# Altium PCB MotionGlove.PcbDoc (part 2 of 2)
Units mm, origin at the board's own origin, x right, y up, seen from the top; angles counter-clockwise.
Board outline 57.6 x 36.45 mm, 2 copper layers (Top Layer, Bottom Layer); 120 components, 83 nets, 444 pads, 151 vias.
Unrouted connection lines stored in the file: 1.
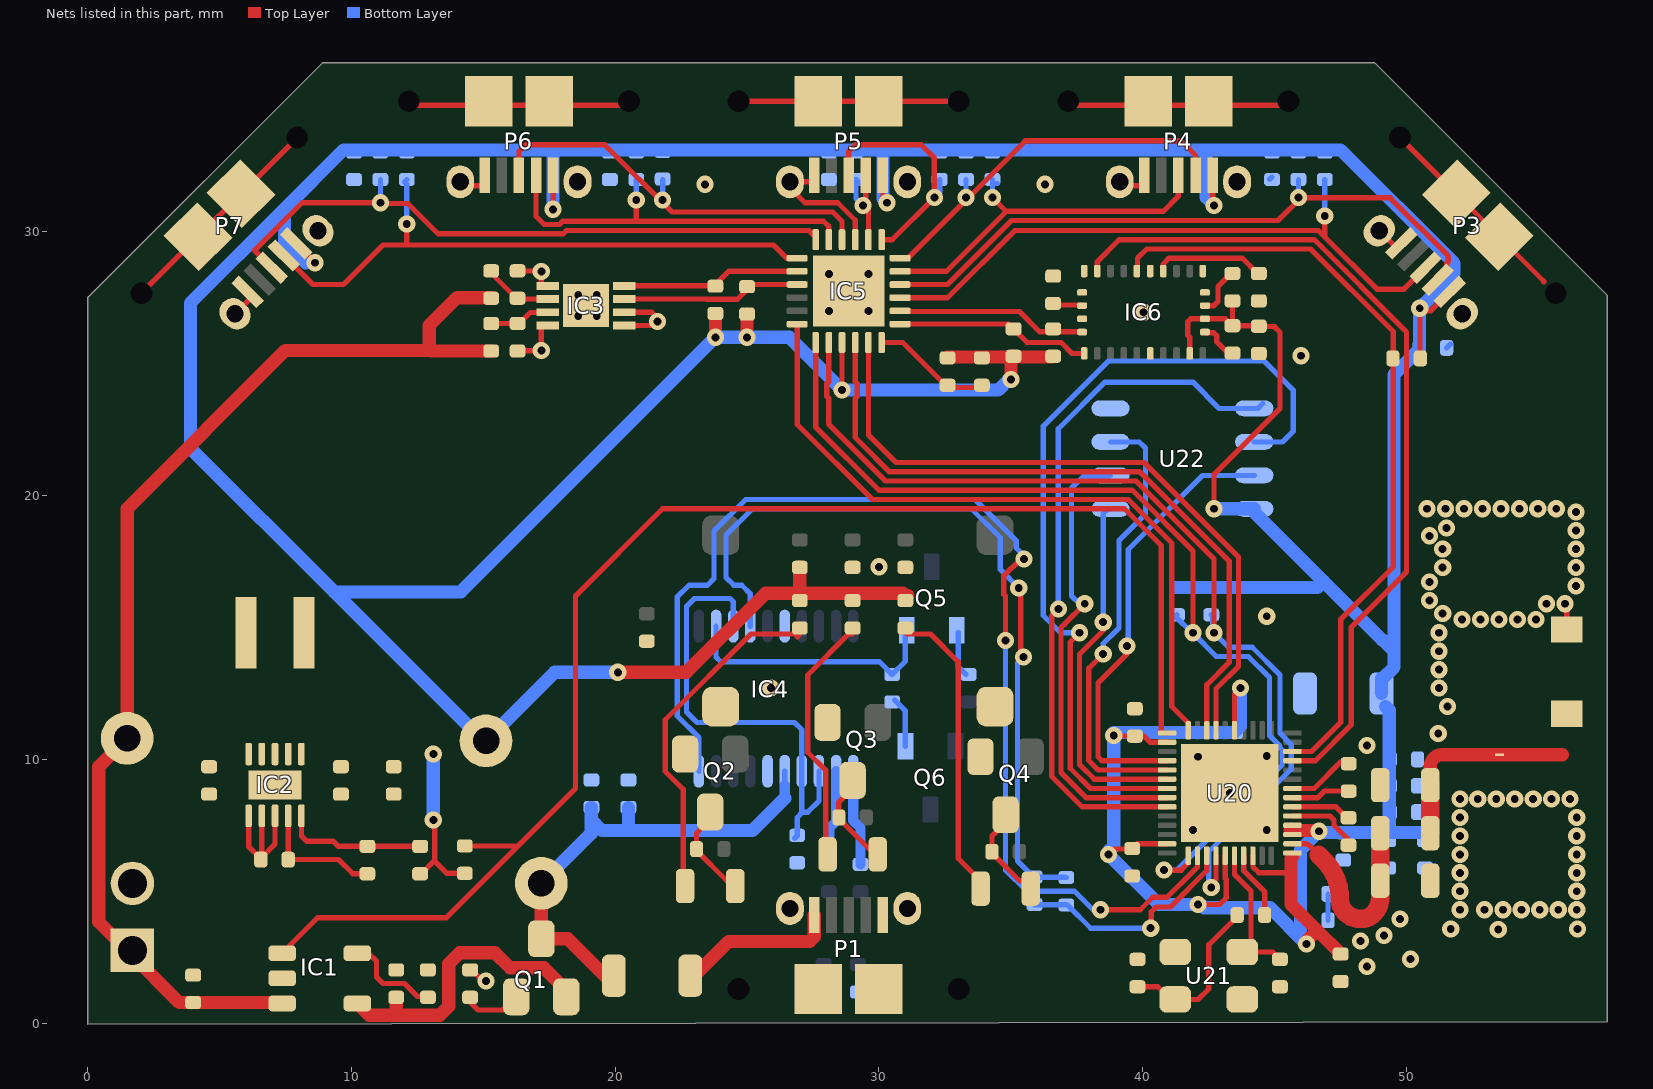
[diagram p2: the nets of this part, all layers, seen from the top]

## Via types
v1: diameter 0.65, hole 0.3, Top Layer to Bottom Layer, 151 vias

## Nets (pads, with @x,y where several pads share a name; then routed paths per layer and width w, separated by ;. In a path a pad name is that pad's centre, name@x,y a point inside that pad or via, vN(x,y) a via of type N, cw(c..) or ccw(c..) an arc to the next point about the centre after c; other vN are vias at no path point) (continued)
GND: C1.1 C3.1 C4.1 C5.2 C6.1 C7.1 C8.1 C9.1 C10.2 C11.1 C12.1 C13.2 C14.2 C17.1 C18.1 C19.1 C21.1 C22.1 C23.1 C24.1 C25.1 C26.2 C27.2 C28.2 C29.2 C30.2 C31.1 C32.1 C33.1 C34.1 C35.1 C36.1 C37.1 C38.1 C39.1 C40.1 C41.1 C42.1 C43.1 C44.1 C45.1 E1.1 E1.2 IC1.2 IC2.3 IC2.9 IC2.11 IC3.1 IC3.4 IC3.5 IC3.6 IC3.9 IC4.6 IC4.16 IC5.9 IC5.25 IC6.2 IC6.5 IC6.6 IC6.10 IC6.15 IC6.16 IC6.18 IC6.25 NT1.2 P1.5 P1.Shell P2.2 P3.5 P3.Shell P4.5 P4.Shell P5.5 P5.Shell P6.5 P6.Shell P7.5 P7.Shell P21.2 P22.2 Q2.S Q3.S Q4.S R1.1 R2.1 R4.1 R19.2 U20.49 U21.2 U21.4 U22.4 | length 69.4
  Top Layer w0.2: P7.Shell@2.048,27.673 P7.Shell@7.952,33.577 ; P7.Shell@5.587,26.891 6.17,27.475 6.17,27.616 P7.5@6.064,27.722 ; IC2.9@7.606,7.762 IC2.9@7.605,7.862 C5.2@7.606,6.202 9.516,6.202 10.056,5.662 R4.1@10.606,5.662 R4.1@10.603,5.659 ; 12.175,34.8 20.525,34.8 ; P6.Shell@14.125,31.745 14.95,31.745 15.05,31.845 P6.5@15.05,31.995 ; R1.1@14.5,2.02 14.564,2.02 14.984,1.6 v1(15.1,1.6) ; C8.1@16.3,25.48 16.31,25.49 17.19,25.49 v1(17.2,25.5) 17.2,26.425 17.225,26.45 IC3.4@17.505,26.45 ; C9.1@16.3,28.52 16.31,28.51 17.19,28.51 v1(17.2,28.5) 17.2,27.975 17.225,27.95 IC3.1@17.505,27.95 ; IC3.5@20.295,26.45 21.383,26.45 v1@21.5,26.567 ; IC3.6@20.295,26.95 21.383,26.95 21.5,26.833 v1@21.5,26.567 ; C26.2@21.21,14.49 C26.2@21.2,14.48 C26.2@21.264,14.48 ; v1(21.6,26.6) 21.533,26.6 v1@21.5,26.567 ; P22.2@23.9,11.844 23.9,11.7 P22.2@24,11.8 ; P5.Shell@24.675,34.95 P5.Shell@33.025,34.95 ; P5.5@27.55,32.145 27.55,31.995 27.45,31.895 26.405,31.895 27.2,31.1 28.436,31.1 29.1,30.436 IC5.9@29.1,29.7 ; IC5.25@28.85,27.75 IC5.25@29.1,28 ; P21.2@34.5,11.7 34.4,11.8 P21.2@34.896,12.296 ; 37.175,34.8 45.525,34.8 ; P4.Shell@39.125,31.745 39.95,31.745 40.05,31.845 P4.5@40.05,31.995 ; IC6.2@42.356,26.2 42.38,26.175 42.682,26.175 42.8,26.057 42.8,25.836 C18.1@43.292,25.344 ; P3.Shell@48.966,30.038 49.55,29.455 49.691,29.455 P3.5@49.797,29.561 ; P3.Shell@49.748,33.577 55.2,28.125 55.2,28.1 ; v1(56,15.9) 56.075,15.825 E1.2@56.075,14.925
  Top Layer w0.5: 53.4,10.175 NT1.2@53.575,10.175
  Bottom Layer w0.2: P5.Shell@31.075,31.895 P5.Shell@31.1,31.87 ; P4.Shell@39.125,31.895 P4.Shell@39.217,31.987 ; C24.1@44.807,31.987 C24.1@44.9,32.08 ; C31.1@47.02,3.9 C32.1@47.02,4.9 ; C25.1@51.52,25.6 C25.1@51.652,25.732 ; P3.Shell@52.113,26.661 P3.Shell@52.113,26.891
  other v1: 48.5,2.15 50.15,2.425 48.25,3.115 49.145,3.32 53.475,3.55 51.675,3.575 56.475,3.575 49.745,3.945 52.025,4.3 52.95,4.3 53.65,4.3 54.35,4.3 55.05,4.3 55.75,4.3 56.45,4.3 52.025,5 56.45,5 52.025,5.7 56.45,5.7 52.025,6.4 56.45,6.4 52.025,7.1 56.45,7.1 41.9,7.325 44.7,7.325 52.025,7.8 56.45,7.8 52.025,8.5 52.7,8.5 53.4,8.5 54.1,8.5 54.8,8.5 55.5,8.5 56.2,8.5 43.3,8.725 42.1,10.1 44.7,10.125 48.5,10.525 51.2,10.975 51.55,12 25.9,12.7 51.225,12.7 51.225,13.4 51.225,14.1 51.225,14.8 52.1,15.3 52.8,15.3 53.5,15.3 54.2,15.3 54.9,15.3 44.7,15.425 51.37,15.53 55.3,15.9 50.875,16.025 56.425,16.575 50.875,16.725 51.37,17.28 56.425,17.275 30,17.3 51.37,17.98 56.425,17.975 50.875,18.475 56.425,18.675 51.52,18.77 56.425,19.375 50.775,19.5 51.475,19.5 52.175,19.5 52.875,19.5 53.575,19.5 54.275,19.5 54.975,19.5 55.675,19.5 46,25.3 18.6,26.8 19.3,26.8 40.028,26.95 28.1,27 29.6,27 18.6,27.6 19.3,27.6 28.1,28.4 29.6,28.4 23.4,31.8 36.3,31.8
I2C_MUX_A0: IC5.22 U20.22 | length 26.5
  Top Layer w0.2: IC5.22@29.1,25.8 29.1,24.313 29.175,24.238 29.175,23.762 29.1,23.687 29.1,22.2 29.525,21.775 30.175,21.125 30.4,20.9 39.895,20.9 43.275,17.52 43.275,13.675 42.425,12.825 U20.22@42.425,11.1
I2C_MUX_A1: IC5.23 U20.21 | length 26.4
  Top Layer w0.2: IC5.23@29.6,25.8 29.6,24.3 29.6,22.3 30.65,21.25 40.05,21.25 43.625,17.675 43.625,13.525 42.775,12.675 U20.21@42.775,11.1
I2C_MUX_A2: IC5.18 U20.24 | length 27.2
  Top Layer w0.2: IC5.18@26.9,26.5 26.9,22.7 29.75,19.85 39.45,19.85 41.1,18.2 41.1,12 41.725,11.375 U20.24@41.725,11.1
I2C_MUX_RST: C20.1 IC5.24 R20.1 | length 4.4
  Top Layer w0.2: IC5.24@30.1,25.8 30.9,25.8 32.52,24.18 32.598,24.192 32.808,24.192 32.9,24.1 33.73,24.1 C20.1@33.765,24.065
LiPo: C3.2 C4.2 IC1.3 IC2.5 P2.1 R11.2 R12.2 TP2.1 | length 44.4
  Top Layer w0.2: C4.2@4.5,9.7 4.707,9.7 4.686,9.722 C4.2@4.722,9.722
  Top Layer w0.5: IC1.3@7.1,0.78 4.6,0.78 3.48,0.78 1.6,2.66 0.425,3.835 0.425,9.725 TP2.1@1.5,10.8 1.5,19.5 7.5,25.5 12.95,25.5 12.95,25.55 ; R11.2@15.3,25.48 13.02,25.48 12.95,25.55 ; R12.2@15.3,27.5 14,27.5 12.95,26.45 12.95,25.55
LNA_IN: C34.2 L2.2 U20.2 | length 12
  Top Layer w0.2: U20.2@45.675,6.8 46.154,6.8 ; 46.318,6.732 ccw(c46.154,6.569) 46.154,6.8 ; 46.5,6.55 46.318,6.732 ccw(c46.154,6.569) 46.154,6.8
  Top Layer w0.7: 46.662,6.388 46.852,6.198 ; L2.2@49,7.2 C34.2@49,5.4 C34.2@49,4.754 ; 46.852,6.198 cw(c45.349,4.694) 47.475,4.694 ; 46.852,6.198 cw(c45.349,4.694) 47.475,4.694 ; 47.475,4.694 ccw(c48.185,4.694) 47.683,4.192 ; 47.475,4.694 ccw(c48.185,4.694) 47.683,4.192 ; 47.683,4.192 ccw(c48.267,4.776) 48.267,3.95 ; 47.683,4.192 ccw(c48.267,4.776) 48.267,3.95 ; 48.267,3.95 ccw(c48.267,4.633) 48.75,4.15 ; 48.267,3.95 ccw(c48.267,4.633) 48.743,4.143 ccw(c48.267,4.633) 48.75,4.15 ; 48.75,4.15 ccw(c48.146,4.754) C34.2@49,4.754 ; 48.75,4.15 ccw(c48.146,4.754) 48.996,4.673 ccw(c48.146,4.754) 49,4.744 ccw(c48.146,4.754) C34.2@49,4.754
Motion/NoMotion: IC6.14 U20.11 | length 32.5
  Top Layer w0.15: U20.11@45.675,9.95 U20.11@45.699,9.974
  Top Layer w0.2: IC6.14@38.278,28.512 38.277,28.878 39.1,29.7 46.505,29.7 50,26.205 50,17.1 47.9,15 47.9,11.3 46.55,9.95 U20.11@45.675,9.95
NetC1_2: C1.2 IC1.4 Q1.S | length 11.5
  Top Layer w0.5: IC1.4@10.225,0.75 10.675,0.3 11.7,0.3 ; C1.2@11.7,0.98 11.7,0.3 ; Q1.S@18.3,1.1 17.3,2.1 16.013,2.1 15.443,2.67 14.108,2.67 13.692,2.254 13.692,0.644 13.348,0.3 11.7,0.3
NetC5_1: C5.1 IC2.6 IC2.7 IC2.8 | length 5.3
  Top Layer w0.2: IC2.6@6.105,7.862 6.105,6.702 C5.1@6.566,6.242 ; C5.1@6.566,6.202 C5.1@6.566,6.242 ; IC2.7@6.605,7.862 C5.1@6.606,6.292 ; IC2.8@7.105,7.862 7.105,6.792 C5.1@6.606,6.292 ; C5.1@6.566,6.242 6.566,6.252 C5.1@6.606,6.292
NetC8_2: C8.2 IC3.3 R11.1 | length 2.5
  Top Layer w0.2: R11.1@15.4,26.62 R11.1@15.3,26.52 C8.2@16.3,26.52 16.364,26.52 16.78,26.936 17.491,26.936 IC3.3@17.505,26.95
NetC9_2: C9.2 IC3.2 R12.1 | length 2.7
  Top Layer w0.2: R12.1@15.31,28.51 R12.1@15.3,28.52 15.3,28.43 16.25,27.48 C9.2@16.3,27.48 ; C9.2@16.3,27.45 17.505,27.45 IC3.2@17.49,27.435
NetC12_2: C12.2 IC4.3 IC4.13 IC4.14 | length 17.7
  Bottom Layer w0.2: IC4.3@24.475,15.05 24.475,15.975 24.35,16.1 23,16.1 22.7,15.8 22.7,11.8 22.9,11.6 23.1,11.4 26.8,11.4 27.075,11.125 IC4.14@27.075,9.55 27.075,8 ; C12.2@26.8,7 26.9,7.1 C12.2@26.9,7.12 26.9,7.8 27.1,8 27.3,8 27.725,8.425 IC4.13@27.725,9.55
NetC17_2: C17.2 IC6.9 | length 4.2
  Top Layer w0.2: IC6.9@40.778,28.512 40.778,28.777 41,29 43.77,29 44.35,28.42 C17.2@44.4,28.42
NetC29_1: C29.1 U20.44 U21.1 | length 5.6
  Top Layer w0.2: U20.44@43.475,6.35 43.475,5.636 44.1,5.011 44.1,3.03 U21.1@43.77,2.7 44.92,2.7 C29.1@45.2,2.42 ; U21.1@43.77,3.1 U21.1@43.789,3.1
NetC30_1: C30.1 R42.2 U21.3 | length 6.4
  Top Layer w0.2: C30.1@39.8,1.38 40.569,1.38 41.049,0.9 U21.3@41.23,0.9 42.1,0.9 42.5,1.3 42.5,2.97 43.58,4.05 R42.2@43.58,4.1 ; U21.3@41.23,1.3 U21.3@41.29,1.3
NetC35_2: C35.2 L2.1 NT1.1 | length 8.5
  Top Layer w0.5: C35.2@50.9,9.025 50.9,9.725 ; NT1.1@53.375,10.175 55.9,10.175 ; NT1.1@53.4,10.175 51.35,10.175 ; 50.9,9.725 cw(c51.35,9.725) 51.35,10.175 ; 50.9,9.725 cw(c51.35,9.725) 51.35,10.175
  Top Layer w0.7: L2.1@50.9,7.2 C35.2@50.9,9.025
NetC46_1: C46.1 U20.6 | length 2.4
  Top Layer w0.15: U20.6@45.675,8.2 U20.6@45.699,8.224
  Top Layer w0.2: U20.6@45.675,8.2 46.413,8.2 47.32,8.2 C46.1@47.8,7.72
NetC46_2: C46.2 U20.5 | length 2.9
  Top Layer w0.15: U20.5@45.675,7.85 U20.5@45.679,7.846
  Top Layer w0.2: U20.5@45.675,7.85 47.1,7.85 47.25,7.7 47.25,7.505 47.75,7.005 47.75,6.745 C46.2@47.8,6.745
NetC47_1: C47.1 U20.8 | length 2.5
  Top Layer w0.2: U20.8@45.675,8.9 46.5,8.9 47.5,9.9 47.52,9.9 C47.1@47.66,9.76
NetC47_2: C47.2 U20.7 | length 2.2
  Top Layer w0.2: U20.7@45.675,8.55 46.645,8.55 46.895,8.8 47.58,8.8 47.585,8.795 C47.2@47.805,8.795
NetD1_1: D1.1 Q2.D R8.2 | length 4.3
  Top Layer w0.2: Q2.D@23.6,8 23.6,7.719 23.081,7.2 23.081,6.601 R8.2@23.08,6.6 23.08,6.55 24.23,5.4 24.45,5.4 24.55,5.5 D1.1@24.55,5.2 D1.1@24.55,4.859
NetD1_2: D1.2 R5.1 | length 13.2
  Top Layer w0.2: D1.2@22.65,5.2 22.58,5.27 22.58,8.863 21.9,9.543 21.9,11.5 25.15,14.75 27,14.75 26.9,14.65
NetD2_1: D2.1 Q3.D R9.2 | length 4.2
  Top Layer w0.2: Q3.D@29,8.919 Q3.D@29,9.2 28.816,9.016 28.816,8.716 28.48,8.38 R9.2@28.48,7.8 28.48,7.75 29.63,6.6 29.85,6.6 29.95,6.7 D2.1@29.95,6.4
NetD2_2: D2.2 R6.1 | length 9.6
  Top Layer w0.2: D2.2@27.98,6.33 D2.2@28.05,6.4 27.98,6.47 27.98,9.59 27.3,10.27 27.3,13.2 28.85,14.75 R6.1@29,14.75
NetD3_1: D3.1 Q4.D R10.2 | length 4.2
  Top Layer w0.2: Q4.D@34.984,7.716 Q4.D@34.8,7.9 34.8,7.619 34.281,7.1 34.281,6.501 R10.2@34.28,6.5 34.28,6.45 35.33,5.4 35.75,5.4 D3.1@35.75,5.1 D3.1@35.77,5.12
NetD3_2: D3.2 R7.1 | length 11.6
  Top Layer w0.2: R7.1@31.05,14.75 31.95,14.75 33,13.7 33,6.25 33.85,5.4 D3.2@33.85,5.1 D3.2@33.65,5.3
NetF1_1: F1.1 P1.1 | length 6.4
  Top Layer w0.2: F1.1@22.625,1.575 F1.1@22.85,1.8
  Top Layer w0.5: F1.1@22.9,1.7 24.3,3.1 27.375,3.1 27.55,3.275 P1.1@27.55,4.1
NetIC1_5: IC1.5 R2.2 | length 4.1
  Top Layer w0.2: IC1.5@10.03,2.65 IC1.5@10.225,2.65 10.65,2.65 10.95,2.35 10.95,1.75 11.2,1.5 12.01,1.5 12.5,1.01 13.07,1.01 R2.2@13.1,0.98
NetIC2_2: IC2.2 L1.2
NetIC2_4: IC2.4 L1.1
NetIC2_10: IC2.10 R3.1 R4.2 | length 5.4
  Top Layer w0.2: IC2.10@8.105,7.862 8.105,7.094 8.3,6.9 9.307,6.9 9.505,6.702 R4.2@10.606,6.702 R3.1@12.606,6.702
NetIC6_4: IC6.4 R18.1 | length 1.9
  Top Layer w0.2: IC6.4@42.356,27.2 42.7,27.2 42.85,27.35 42.85,27.92 43.35,28.42 R18.1@43.4,28.42
NetIC6_17: IC6.17 R19.1 | length 1.1
  Top Layer w0.2: R19.1@36.6,27.225 37.675,27.225 IC6.17@37.7,27.2
NetQ1_G: Q1.G R1.2 | length 2.1
  Top Layer w0.2: R1.2@14.5,0.8 14.8,0.5 15.75,0.5 Q1.G@16.25,1
NetQ5_1: Q5.1 R15.2 | length 1.7
  Bottom Layer w0.2: Q5.1@33,14.8 33,13.52 R15.2@33.3,13.22
NetQ6_1: Q6.1 R16.2 | length 1.9
  Bottom Layer w0.2: R16.2@30.592,12.244 31,11.836 Q6.1@31,10.5
NetR40_1: R40.1 R41.1 U20.41 | length 8.8
  Top Layer w0.2: v1(40.3,3.6) 40.325,3.625 40.325,4.225 40.5,4.4 41.044,4.4 42.425,5.781 U20.41@42.425,6.35
  Bottom Layer w0.2: R40.1@35.9,4.5 35.91,4.49 37.09,4.49 R41.1@37.1,4.48 37.15,4.48 38.03,3.6 40.2,3.6 v1@40.3,3.7
NetR42_1: R42.1 U20.45 | length 2.6
  Top Layer w0.2: U20.45@43.825,6.35 43.825,5.781 44.62,4.986 R42.1@44.62,4.1
nReset_BNO055: IC6.11 R17.1 U20.12 | length 29.6
  Top Layer w0.2: IC6.11@39.8,28.513 39.8,29 40.15,29.35 46.36,29.35 49.5,26.21 49.5,17.3 47.5,15.3 47.5,11.4 46.4,10.3 U20.12@45.675,10.3
RTS: IC4.2 Q5.2 R16.1 | length 10
  Bottom Layer w0.2: IC4.2@23.825,15.05 23.825,13.875 24,13.7 30.02,13.7 R16.1@30.5,13.22 31,13.72 Q5.2@31,14.9
RXD: IC4.20 U20.40 | length 46.4
  Top Layer w0.2: v1(34.8,14.5) 34.8,16.187 34.725,16.262 34.725,16.947 35.378,17.6 v1(35.5,17.6) ; 39.692,4.3 v1(38.4,4.3) 39.905,4.3 40.38,4.775 40.924,4.775 41.899,5.75 42.075,5.926 U20.40@42.075,6.35
  Bottom Layer w0.2: IC4.20@23.175,9.55 23.175,10.83 22.35,11.655 22.35,16.15 22.8,16.6 23.5,16.6 23.75,16.85 23.75,18.65 24.95,19.85 33.645,19.85 35.2,18.295 35.2,18.022 35.5,17.722 v1(35.5,17.6) ; v1(34.8,14.5) 34.8,5.8 35.6,5 37.41,5 38.11,4.3 v1(38.4,4.3)
SCK/CLK: U20.31 U22.6 | length 32.2
  Top Layer w0.2: v1(37.6,14.8) 37.25,14.45 37.25,9.665 38.015,8.9 U20.31@40.925,8.9
  Bottom Layer w0.2: v1(37.6,14.8) 36.887,14.8 36.225,15.462 36.225,22.625 38.7,25.1 44.6,25.1 45.7,24 45.7,22.435 45.3,22.035 U22.6@44.225,22.035
SCL: IC5.19 R22.1 U20.39 | length 37.8
  Top Layer w0.2: IC5.19@27.6,25.8 27.6,22.6 30,20.2 39.605,20.2 41.9,17.905 v1(41.9,14.8) ; v1(40.8,5.8) 41.454,5.8 U20.39@41.725,6.071
  Bottom Layer w0.2: v1(40.8,5.8) 41.3,5.8 45.275,9.775 45.275,10.363 45.2,10.438 45.2,10.5 44.8,10.9 44.8,13.1 44,13.9 42.787,13.9 41.9,14.787 v1(41.9,14.8) 41.86,14.8 41.24,15.42 R22.1@41.3,15.48
SCL0: IC5.2 IC6.19 R24.1 | length 7.2
  Top Layer w0.2: IC5.2@30.8,27 30.825,26.975 35.325,26.975 36.09,26.21 37.69,26.21 IC6.19@37.7,26.2
SCL1: IC5.4 P3.2 R26.1 | length 25.4
  Top Layer w0.2: IC5.4@30.8,28 32.6,28 35.025,30.425 45.125,30.425 v1@45.988,31.288 ; v1@45.9,31.175 v1@46.013,31.288 ; v1(45.9,31.3) 45.975,31.3 v1@45.988,31.288 ; v1@46.1,31.175 v1@46.1,31.288 ; P3.2@51.176,28.182 51.512,28.518 51.512,28.801 51.585,28.874 51.585,29.081 49.379,31.288 v1@46.1,31.288 ; v1@45.988,31.288 v1@46.013,31.288 ; v1@45.988,31.288 46.1,31.4 v1@46.1,31.288 ; v1@46.013,31.288 v1@46.1,31.288
  Bottom Layer w0.2: v1(45.9,31.3) R26.1@45.9,31.98
SCL2: IC5.6 P4.2 R28.1 | length 14.7
  Top Layer w0.2: IC5.6@30.8,29 31.1,29 35.55,33.45 41.45,33.45 42,32.9 P4.2@42,32.145
  Bottom Layer w0.2: v1(33.3,31.3) R28.1@33.3,31.98
SCL3: IC5.8 P5.2 R31.1 | length 3.8
  Top Layer w0.2: P5.2@29.5,32.145 29.5,31.213 29.6,31.113 IC5.8@29.6,29.7
  Bottom Layer w0.2: R31.1@29.1,31.98 29.136,31.98 29.285,31.832 29.132,31.832 29.132,31.268 v1(29.4,31)
SCL4: IC5.11 P6.2 R33.1 | length 14.8
  Top Layer w0.2: P6.2@17,31.995 17,30.587 17.309,30.277 17.884,30.277 18.007,30.4 20.8,30.4 ; v1(20.8,31.2) 20.8,30.4 ; IC5.11@28.1,29.7 28.1,30.2 27.9,30.4 20.8,30.4
  Bottom Layer w0.2: v1(20.8,31.2) R33.1@20.8,31.98
SCL5: IC5.13 P7.2 R35.1 | length 23.3
  Top Layer w0.2: P7.2@7.443,29.101 8.544,28 9.7,28 11.2,29.5 12.1,29.5 ; v1(12.1,30.3) 12.1,29.5 ; IC5.13@26.9,29 26.5,29 26,29.5 12.1,29.5
  Bottom Layer w0.2: v1(12.1,30.3) 12.1,31.8 12.01,31.89 R35.1@12.1,31.98
SCL_FUEL_GAUGE: IC3.7 IC5.15 R38.1 | length 6.8
  Top Layer w0.2: IC3.7@20.295,27.45 23.46,27.45 23.47,27.44 24.64,27.44 25.2,28 IC5.15@26.9,28
SCS/CMD: U20.30 U22.1 | length 13.8
  Top Layer w0.2: v1(38.5,15.2) 38.5,14.887 37.6,13.987 37.6,9.81 38.16,9.25 U20.30@40.925,9.25
  Bottom Layer w0.2: v1(38.5,15.2) 38.5,19.31 38.685,19.495 U22.1@38.775,19.495
SDA: IC5.20 R21.1 U20.42 | length 37.5
  Top Layer w0.2: IC5.20@28.1,25.8 28.1,24.313 28.025,24.238 28.025,23.762 28.1,23.687 28.1,22.7 30.25,20.55 30.255,20.55 30.545,20.55 39.75,20.55 42.7,17.6 v1(42.7,14.8) v1@42.775,14.725 ; v1(42.594,5.137) 42.594,5.259 42.775,5.439 U20.42@42.775,6.35
  Bottom Layer w0.2: v1(42.594,5.137) 42.5,5.231 42.5,6.5 45.625,9.625 45.625,10.57 45.2,10.995 45.2,13.2 44.15,14.25 43.25,14.25 v1(42.7,14.8) 42.65,14.85 42.65,15.43 R21.1@42.6,15.48
SDA0: IC5.1 IC6.20 R23.1 | length 7.6
  Top Layer w0.2: IC5.1@30.8,26.5 34.92,26.5 R23.1@35.1,26.32 35.62,25.8 36.91,25.8 37.323,25.388 IC6.20@37.778,25.388 37.778,25.5 IC6.20@37.752,25.525
SDA1: IC5.3 P3.3 R25.1 | length 24.4
  Top Layer w0.2: IC5.3@30.8,27.5 32.6,27.5 35.15,30.05 46.65,30.05 46.9,29.8 ; v1(46.9,30.6) 46.9,29.8 ; P3.3@50.717,28.642 49.9,27.825 48.875,27.825 46.9,29.8
  Bottom Layer w0.2: v1(46.9,30.6) R25.1@46.9,31.98
SDA2: IC5.5 P4.3 R27.1 | length 14
  Top Layer w0.2: IC5.5@30.8,28.5 32.55,28.5 34.825,30.775 ; v1(34.3,31.3) 34.825,30.775 ; P4.3@41.35,31.995 41.35,31.35 40.775,30.775 34.825,30.775
  Bottom Layer w0.2: v1(34.3,31.3) R27.1@34.3,31.8 ; R27.1@34.3,31.98 R27.1@34.3,31.832 ; R27.1@34.485,31.832 R27.1@34.332,31.832 ; R27.1@34.3,31.8 R27.1@34.3,31.832 ; R27.1@34.3,31.8 R27.1@34.332,31.832 ; R27.1@34.3,31.832 R27.1@34.332,31.832
SDA3: IC5.7 P5.3 R30.1 | length 9.5
  Top Layer w0.2: P5.3@28.909,32.086 P5.3@28.85,32.145 28.85,33.05 29.1,33.3 31.6,33.3 32.1,32.8 v1(32.1,31.3) 30.5,29.7 IC5.7@30.1,29.7
  Bottom Layer w0.2: v1(32.1,31.3) 32.3,31.5 R30.1@32.3,31.98
SDA4: IC5.10 P6.3 R32.1 | length 16.1
  Top Layer w0.2: P6.3@16.35,31.995 P6.3@16.35,32.145 16.35,33.05 16.6,33.3 19.6,33.3 22.15,30.75 28.25,30.75 28.6,30.4 IC5.10@28.6,29.7
  Bottom Layer w0.2: v1(21.8,31.2) R32.1@21.8,31.98
SDA5: IC5.12 P7.3 R34.1 | length 24.7
  Top Layer w0.2: P7.3@6.983,28.642 6.329,29.296 8.134,31.1 v1@11.05,31.1 ; v1(11.1,31.1) v1@11.05,31.1 ; IC5.12@27.6,29.7 27.6,29.8 27.35,30.05 18.152,30.05 18.029,29.927 13.286,29.927 12.138,31.075 11.025,31.075 v1@11.05,31.1
  Bottom Layer w0.2: v1(11.1,31.1) R34.1@11.1,31.98
SDA_FUEL_GAUGE: IC3.8 IC5.14 R37.1 | length 6.8
  Top Layer w0.2: IC3.8@20.295,27.95 23.75,27.95 24.3,28.5 IC5.14@26.9,28.5
SDI/SD1: U20.33 U22.5 | length 27.1
  Top Layer w0.2: v1(36.8,15.7) 36.55,15.45 36.55,9.355 37.705,8.2 U20.33@40.925,8.2
  Bottom Layer w0.2: v1(36.8,15.7) 36.8,22.533 38.567,24.3 41.9,24.3 42.895,23.305 U22.5@44.225,23.305 44.365,23.305 U22.5@44.55,23.49
SDO/SD0: U20.32 U22.2 | length 17.6
  Top Layer w0.2: v1(37.8,15.9) 37.8,15.887 37.038,15.125 37.025,15.125 36.9,15 36.9,9.5 37.85,8.55 U20.32@40.925,8.55
  Bottom Layer w0.2: v1(37.8,15.9) 37.6,15.9 37.3,16.2 37.3,20.283 37.75,20.733 38.743,20.733 U22.2@38.775,20.765
SHD/SD2: U20.28 U22.7 | length 17
  Top Layer w0.2: v1(39.4,14.3) 39.4,14 38.3,12.9 38.3,10.1 38.45,9.95 U20.28@40.925,9.95
  Bottom Layer w0.2: v1(39.4,14.3) 39.45,14.35 39.45,17.95 42.265,20.765 U22.7@44.225,20.765
STAT: IC1.1 R43.1 U20.25 | length 54.5
  Top Layer w0.2: IC1.1@7.375,2.65 8.725,4 13.6,4 16.32,6.72 ; R43.1@14.264,6.72 R43.1@14.3,6.72 16.32,6.72 ; U20.25@40.925,11 40.7,11 40.7,18.105 39.305,19.5 21.8,19.5 18.5,16.2 18.5,8.9 16.32,6.72
SWP/SD3: U20.29 U22.3 | length 17.3
  Top Layer w0.2: v1(38.5,14) 37.95,13.45 37.95,9.955 38.305,9.6 U20.29@40.925,9.6
  Bottom Layer w0.2: v1(38.5,14) 38.5,14.387 39.1,14.987 39.1,18.3 40.1,19.3 40.1,21.8 39.865,22.035 U22.3@38.775,22.035
TXD: IC4.4 R40.2 R41.2 | length 30
  Top Layer w0.2: v1(35.3,16.5) 35.375,16.425 35.375,14.097 35.475,13.997 v1(35.475,13.875)
  Bottom Layer w0.2: IC4.4@25.125,15.05 25.125,16.275 24.8,16.6 24.5,16.6 24.2,16.9 24.2,18.5 25.2,19.5 33.5,19.5 34.6,18.4 34.6,17.2 v1(35.3,16.5) ; v1(35.475,13.875) 35.25,13.65 35.25,6.15 R40.2@35.856,5.544 ; R40.2@35.9,5.54 35.91,5.53 37.04,5.53 37.05,5.52 R41.2@37.1,5.52
USB_IC_N: IC4.12 R13.2 | length 3.7
  Bottom Layer w0.381: R13.2@28.1,6.02 R13.2@28.125,6.02 ; R13.2@28.15,6.02 R13.2@28.125,6.02 ; IC4.12@28.375,9.55 28.375,7.645 28.125,7.395 R13.2@28.125,6.02
USB_IC_P: IC4.11 R14.2 | length 3.6
  Bottom Layer w0.381: IC4.11@29.025,9.55 29.025,7.675 29.3,7.4 R14.2@29.3,6.02
VDD33: C6.2 C7.2 C18.2 C19.2 C20.2 C21.2 C22.2 C23.2 C24.2 C25.2 C28.1 C31.2 C32.2 C33.2 C36.2 C37.2 C38.2 C39.2 C40.2 C41.2 C42.2 C44.2 C45.2 IC2.1 IC5.21 IC6.3 IC6.28 P3.1 P4.1 P5.1 P6.1 P7.1 R3.2 R5.2 R6.2 R7.2 R17.2 R18.2 R20.2 R21.2 R22.2 R23.2 R24.2 R25.2 R26.2 R27.2 R28.2 R30.2 R31.2 R32.2 R33.2 R34.2 R35.2 R37.2 R38.2 R39.2 R43.2 TP3.1 U20.1 U20.3 U20.4 U20.19 U20.26 U20.37 U20.43 U20.46 U22.8 | length 251.6
  Top Layer w0.2: P7.1@7.903,29.561 v1@8.631,28.832 ; R3.2@12.606,5.662 12.655,5.662 13.156,6.162 13.156,6.774 13.156,7.652 v1(13.106,7.702) ; v1(13.106,10.202) v1@13.192,10.288 ; 13.147,6.153 13.62,5.68 R43.2@14.3,5.68 ; TP3.1@15,10.807 TP3.1@15.106,10.702 ; v1@17.65,30.75 P6.1@17.65,31.995 ; 27,16.338 27.039,16.3 R5.2@27.123,16.215 ; v1(28.6,24) 28.6,25.78 28.61,25.79 IC5.21@28.6,25.8 ; v1@30.15,31.002 P5.1@30.15,32.145 ; R20.2@32.63,25.25 R20.2@32.6,25.22 R20.2@32.64,25.18 ; R23.2@34.92,25.28 R23.2@34.95,25.25 ; R23.2@35,25.2 R23.2@34.95,25.25 ; R23.2@35.05,25.25 R23.2@34.95,25.25 ; R24.2@36.57,25.25 R24.2@36.6,25.28 ; v1(38.7,6.4) 38.9,6.6 C28.1@39.52,6.6 ; v1(38.9,10.9) 38.91,10.89 39.69,10.89 C45.2@39.7,10.88 40.045,10.88 40.275,10.65 U20.26@40.925,10.65 ; C28.1@39.6,6.62 39.78,6.8 U20.37@40.925,6.8 ; IC6.28@41.778,25.388 41.778,26.003 41.7,26.08 41.7,26.583 41.817,26.7 43.14,26.7 C18.2@43.4,26.44 ; v1(42.1,4.5) 42.913,4.5 43.169,4.756 43.169,5.446 43.125,5.491 U20.43@43.125,6.35 ; v1@42.65,31.15 P4.1@42.65,31.995 ; v1(42.7,19.5) 42.7,20.8 45.2,23.3 45.2,26.19 45,26.39 45,26.41 44.41,26.41 C19.2@44.4,26.42 ; R18.2@43.4,27.38 C18.2@43.4,26.44 ; U20.19@43.475,11.1 43.475,12.475 v1(43.7,12.7) ; U20.46@44.175,6.35 44.175,5.926 44.401,5.7 45.615,5.7 ; C19.2@44.4,26.44 C18.2@43.4,26.44 ; v1(46.2,3) v1@46.2,3.1 ; v1(50.5,27.1) 50.51,27.09 v1@50.51,27 ; R17.2@50.52,25.2 50.51,25.21 v1@50.51,27 ; P3.1@51.636,27.722 50.913,27 v1@50.51,27
  Top Layer w0.5: v1(20.1,13.3) 22.7,13.3 25.7,16.3 27.039,16.3 ; v1(23.8,26) R37.2@23.8,26.9 ; v1(25,26) R38.2@25,26.88 ; 27,16.338 R39.2@27,17.28 ; R5.2@27.123,16.215 27.25,16.3 30.916,16.3 30.983,16.233 30.994,16.221 R7.2@31.1,16.2 ; R20.2@32.6,25.25 32.63,25.25 R23.2@34.95,25.25 ; v1(35,24.4) 35,25.2 R23.2@35.05,25.25 ; R23.2@35.08,25.28 R23.2@35.05,25.25 ; R24.2@36.57,25.25 R23.2@35.05,25.25 ; 45.592,7.35 45.669,7.347 45.675,7.347 ; 45.675,6.3 45.615,6.24 45.615,5.7 45.615,4.51 46.613,3.513 ; 45.676,7.347 45.722,7.3 46.65,7.3 v1(46.675,7.275) ; v1@46.2,3.1 46.613,3.513 ; C33.2@47.502,2.622 46.613,3.513
  Bottom Layer w0.2: 8.273,28.827 v1(8.625,28.827) ; 17.6,33.1 17.646,33.054 ; 23.85,33.1 23.9,33.05 ; v1@34.916,24.4 v1(35,24.4) ; 36.6,33.1 36.62,33.08 ; v1(38.7,6.4) v1@38.7,6.511 ; v1(42.7,19.5) v1@42.702,19.497 ; C44.2@43.45,11.02 C44.2@43.5,11.02 43.536,11.02 C44.2@43.536,11.1 ; U22.8@44.223,19.497 U22.8@44.225,19.495 U22.8@44.225,19.375 ; C25.2@50.48,25.6 C25.2@50.493,25.613 ; v1@50.493,26.987 50.507,27 v1@50.507,27.107
  Bottom Layer w0.5: 8.273,28.827 7.46,29.64 7.46,30.86 ; v1(13.106,7.702) v1(13.106,10.202) ; v1(17.646,30.852) 17.646,33.054 ; v1(20.1,13.3) 17.704,13.3 TP3.1@15.106,10.702 14.998,10.702 9.35,16.35 ; v1(30.3,31.1) 30.148,31.252 30.148,33.052 30.1,33.1 ; v1@34.916,24.4 34.516,24 v1(28.6,24) 26.6,26 v1(25,26) v1(23.8,26) 14.15,16.35 9.35,16.35 ; v1(38.7,6.4) 40.6,4.5 v1(42.1,4.5) ; v1@38.7,6.511 38.9,6.711 v1(38.9,10.9) 38.9,11.02 C44.2@43.45,11.02 ; R22.2@41.3,16.52 R21.2@42.6,16.52 46.62,16.52 46.85,16.75 ; v1@42.2,4.5 42.325,4.375 44.825,4.375 v1(46.2,3) ; v1(42.7,31) 42.4,31.3 42.4,33.1 ; v1@42.702,19.497 U22.8@44.223,19.497 ; C44.2@43.536,11.1 43.7,11.264 v1(43.7,12.7) ; U22.8@44.225,19.375 46.85,16.75 ; 45.98,3.3 C31.2@45.98,3.9 C32.2@45.98,4.9 45.98,6.58 46.63,7.23 50.757,7.23 ; C42.2@49.05,12.5 49.05,13.075 49.1,13.075 49.525,13.5 49.525,14.1 ; C42.2@49.206,12 49.343,11.862 49.343,7.292 ; C25.2@50.48,25.6 50.48,25.55 49.525,24.595 49.525,14.1 ; C25.2@50.493,25.613 v1@50.493,26.987 ; v1@50.507,27.107 51.8,28.4 51.8,28.8 47.5,33.1 42.4,33.1 ; 7.46,30.86 9.7,33.1 11.1,33.1 17.6,33.1 23.85,33.1 29.1,33.1 30.1,33.1 ; 7.46,30.86 3.9,27.3 3.9,21.8 9.35,16.35 ; 30.1,33.1 34.3,33.1 36.6,33.1 42.4,33.1 ; 46.85,16.75 49.075,14.525 49.1,14.525 49.525,14.1
VDD_USB: C13.1 C14.1 F1.2 IC4.15 Q1.D TP1.1 | length 20.3
  Top Layer w0.2: F1.2@19.816,1.8 19.95,1.665 F1.2@19.95,1.8 F1.2@19.95,2.15
  Top Layer w0.5: TP1.1@17.2,5.3 Q1.D@17.2,3.2 18.2,3.2 F1.2@19.95,1.45
  Bottom Layer w0.2: TP1.1@17.356,4.956 TP1.1@17.7,5.3 ; IC4.15@26.425,9.025 IC4.15@26.425,9.55
  Bottom Layer w0.4: 26.425,8.525 IC4.15@26.425,9.025
  Bottom Layer w0.5: TP1.1@17.2,5.3 19.092,7.192 19.092,7.708 ; C13.1@19.092,8.18 19.092,7.708 ; C14.1@20.5,8.18 20.5,7.3 ; 26.425,8.525 25.2,7.3 20.5,7.3 ; 19.092,7.708 19.5,7.3 20.5,7.3
pads on no net: IC1.0 IC4.0 IC4.5 IC4.7 IC4.8 IC4.9 IC4.10 IC4.17 IC4.18 IC4.19 IC5.16 IC5.17 IC6.1 IC6.7 IC6.8 IC6.12 IC6.13 IC6.21 IC6.22 IC6.23 IC6.24 IC6.26 IC6.27 P1.4 Q1.0 Q2.0 Q3.0 Q4.0 U20.10 U20.18 U20.20 U20.27 U20.34 U20.47 U20.48
copper on no net: | length 6.3
  Top Layer w0.15: 45.675,9.6 45.695,9.62
  Top Layer w0.2: 38.9,10.3 40.925,10.3 ; 39,7.85 40.925,7.85 ; 43.125,11.1 43.125,12.4 ; 43.825,11.1 43.825,11.63 43.825,12.1

## Polygon pours and split planes (outlines as drawn)
GND on Top Layer "Top Layer-GND 1" (solid, pour order 42): 0,-0.05 0,27.5 8.8,36.3 48.9,36.3 57.5,27.7 57.5,-0.05
VDD33 on Top Layer "Top Layer-VDD33" (solid, pour order 10): 8.106,10.702 9.106,11.702 14.8,11.702 14.8,9.702 8.106,9.702
LiPo on Top Layer "Top Layer-LiPo" (solid, pour order 6): 6.106,10.702 5.106,11.702 1.7,11.702 1.7,9.702 6.106,9.702
GND on Top Layer "Top Layer-GND" (solid, pour order 12): 2.606,9.202 13.606,9.202 13.606,8.202 5.606,8.202 5.606,7.702 2.606,7.702
NetIC2_2 on Top Layer "Top Layer-NetIC2_2" (solid, pour order 16): 7.4,9.996 7.4,16.702 10.106,16.702 10.106,12.702
NetIC2_4 on Top Layer "Top Layer-NetIC2_4" (solid, pour order 14): 6.8,10.007 6.8,16.702 4.106,16.702 4.106,12.702
GND on Top Layer "GND_L01_P018" (solid, remove dead copper, pour order 18): 56.675,8.425 55.475,8.425 55.475,11.725 56.675,11.725
no net on Top Layer "Top Layer-No Net" (solid, pour order 8): 9.106,5.202
GND on Bottom Layer "Bottom Layer-GND" (solid, pour order 44): 0,-0.05 0,27.5 8.8,36.3 48.9,36.3 57.5,27.7 57.5,0
no net on Bottom Layer "Bottom Layer-No Net 1" (solid, pour order 40): -0.2,-0.3
no net on Bottom Layer "Bottom Layer-No Net" (solid, pour order 22): -0.2,-0.3

## Keep-outs
Keep-Out Layer:
  lines w0.3: -0.2,-0.256 -0.2,27.6 3.1,30.9 5.6,33.4 8.7,36.5 49,36.5 54.1,31.4 57.7,27.8 57.7,-0.256 54.175,-0.256 42,-0.256 41.8,-0.256 41.231,-0.256 13.781,-0.256 -0.2,-0.256

## Other copper
Top Layer:
  rectangle net GND: 55.475,8.925 56.673,11.075
  pour cut-out: 57.6,2.2 57.6,20.3 56.9,20.3 56.9,2.2
  pour cut-out: 56.675,14.925 56.875,14.925 56.875,8.925 56.673,8.925 56.673,14.923
  pour cut-out: 55.475,8.925 55.475,12.225 57.5,12.225 57.5,14.925 51.875,14.925 51.875,8.925
Bottom Layer:
  pour cut-out: 55.475,8.925 56.8,8.925 56.8,14.925 51.875,14.925 51.875,8.925

## Silkscreen, mask and mechanical layers (free items; w line width, h text height)
Mechanical 14:
  lines w0.2: 0,0 0,27.5 8.8,36.3 48.9,36.3 57.5,27.7 57.5,0 0,0

## Text inside footprints (layer, text, board x,y; h text height)
P1: Mechanical 2 "PCB Edge" at 27.75,-0.705 h0.41
P3: Mechanical 2 "PCB Edge" at 54.892,31.261 h0.41 r135
P4: Mechanical 2 "PCB Edge" at 42.45,36.95 h0.41 r180
P5: Mechanical 2 "PCB Edge" at 29.95,36.95 h0.41 r180
P6: Mechanical 2 "PCB Edge" at 17.45,36.95 h0.41 r180
P7: Mechanical 2 "PCB Edge" at 4.364,32.817 h0.41 r225